# EAGLE board nrfctl (EAGLE 6.4)
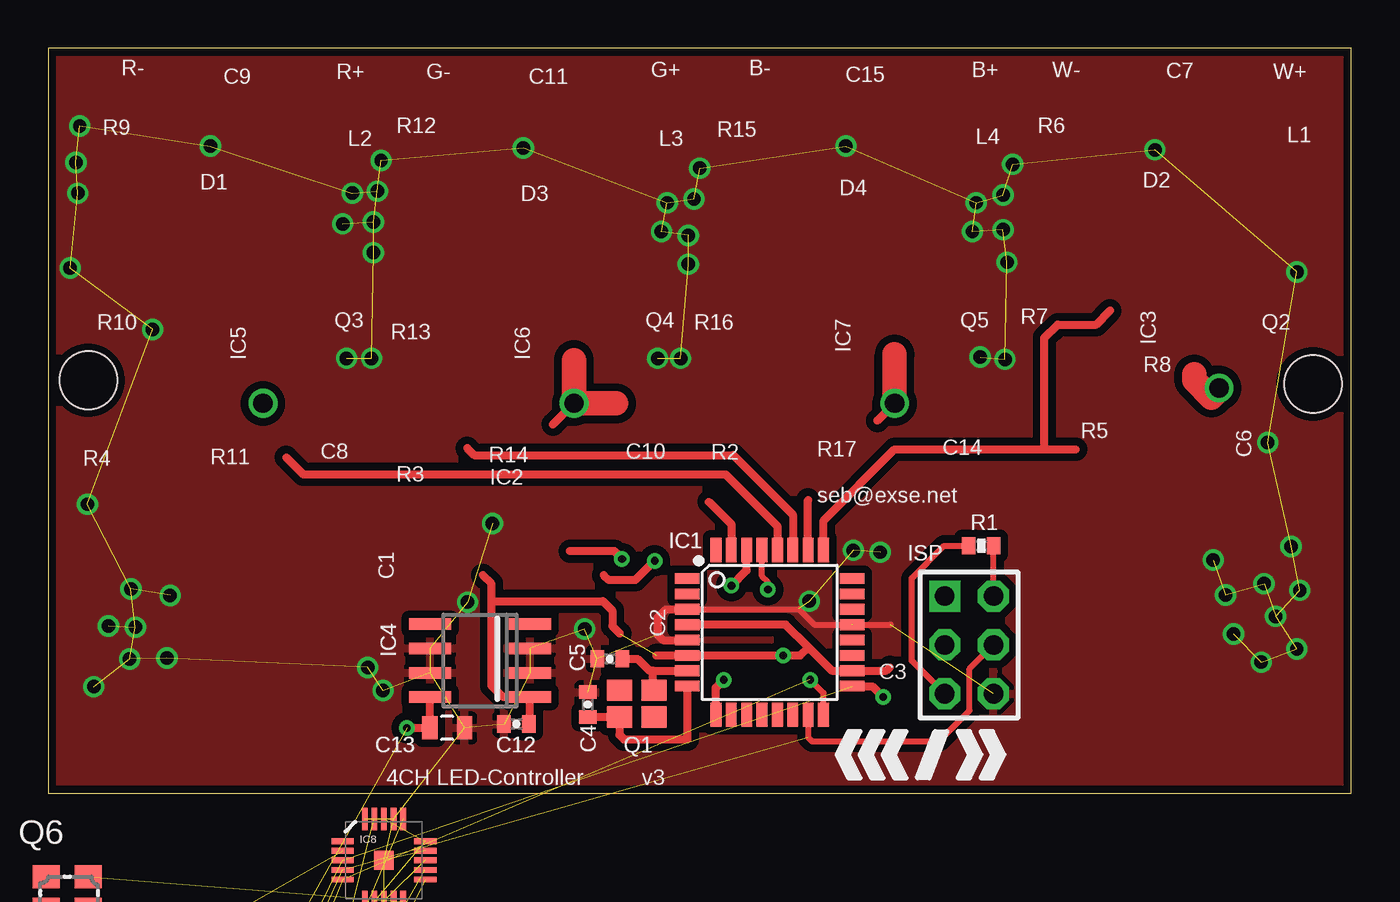
[diagram p0: board, top side]
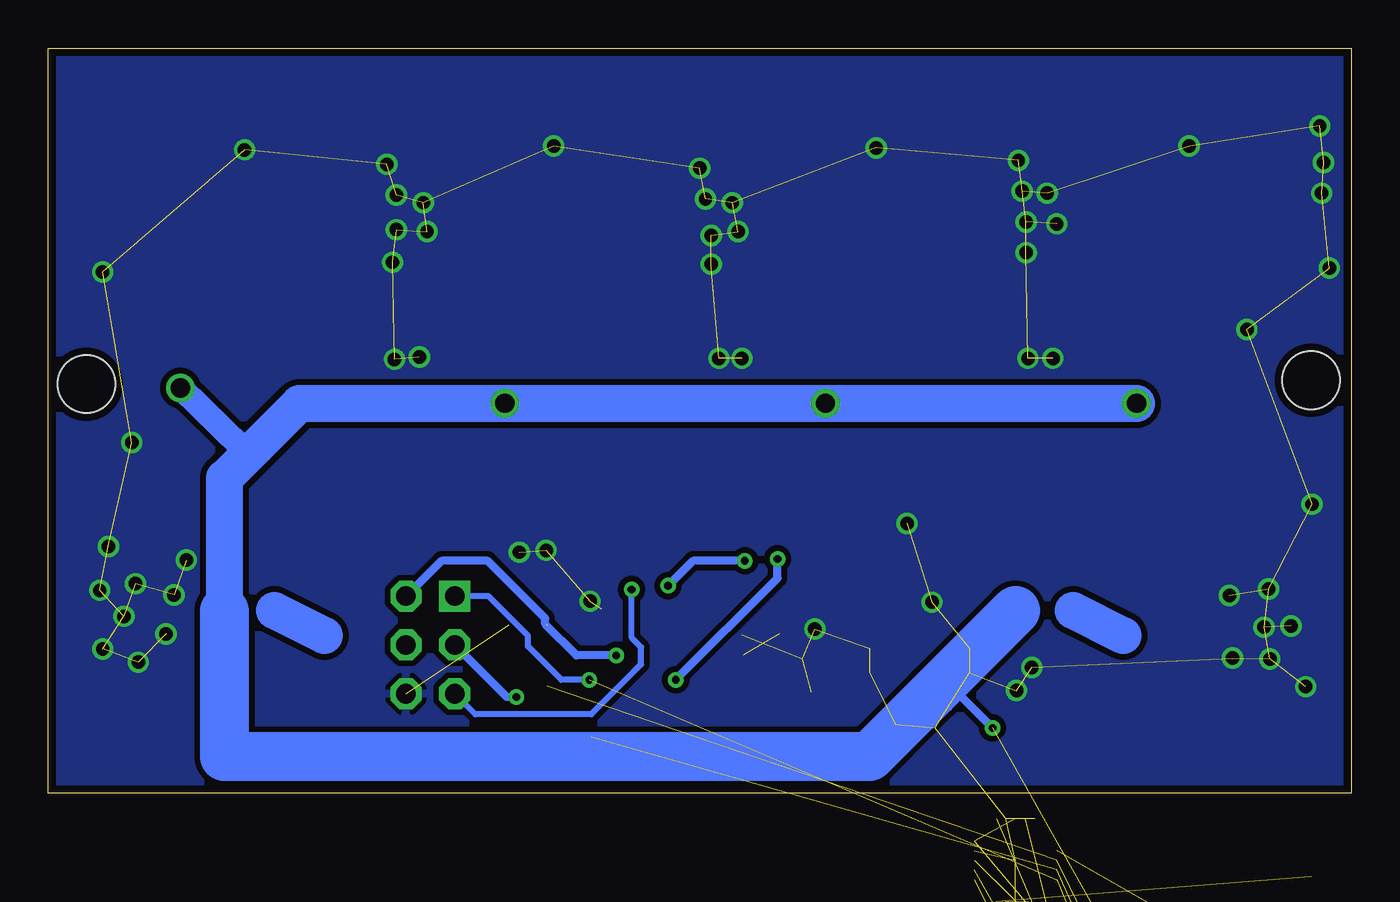
[diagram p1: board, bottom side, seen from below]

Size 67.9 x 38.8 mm. Coordinates in mm from the lower left corner, seen from the top.
Outline: 0,0 67.9,0 67.9,38.8 0,38.8 0,0
Copper layers (1*16): Top 0.035mm / dielectric 1.5mm / Bottom 0.035mm
Design rules "default *": minimum track width 0.2mm, minimum drill 0.5mm, track to track 0.2mm, track to pad 0.2mm, pad to pad 0.2mm, via to via 0.2mm, smd to smd 0mil, copper to edge 0.4mm, drill to drill 8mil, minimum pad ring 0.3mm, minimum via ring 8mil, stop-mask expansion 4mil, vias tented up to drill 40mil, thermal gap 10mil
Net classes: 2 GND/3V3: width 0.2 mm, drill 0.4 mm
Holes 3 mm at 2.1,21.5 65.9,21.3

## Footprints (pad centres in the part's own frame; a part is rotated, then mirrored left to right if it is on the bottom)
CHIPANTENNA = smd 4 x 1.8: 0 3.95,0 | smd 1 x 1.8: 1 -2.45,0
0402-CAP = smd 0.7 x 0.9: 1 -0.65,0; 2 0.65,0
0805 = smd 0.8 x 1.2: 1 -0.9,0; 2 0.9,0
C0402K = smd 0.925 x 0.74: 1 -0.6,0; 2 0.6,0
C0805K = smd 1.3 x 1.6: 1 -1,0; 2 1,0
R0805 = smd 1.3 x 1.5: 1 -0.95,0; 2 0.95,0
TQFP32-08 = smd 1.27 x 0.559: 1 -4.293,2.8; 2 -4.293,2; 3 -4.293,1.2; 4 -4.293,0.4; 5 -4.293,-0.4; 6 -4.293,-1.2; 7 -4.293,-2; 8 -4.293,-2.8; 17 4.293,-2.8; 18 4.293,-2; 19 4.293,-1.2; 20 4.293,-0.4; 21 4.293,0.4; 22 4.293,1.2; 23 4.293,2; 24 4.293,2.8 | smd 0.559 x 1.27: 9 -2.8,-4.293; 10 -2,-4.293; 11 -1.2,-4.293; 12 -0.4,-4.293; 13 0.4,-4.293; 14 1.2,-4.293; 15 2,-4.293; 16 2.8,-4.293; 25 2.8,4.293; 26 2,4.293; 27 1.2,4.293; 28 0.4,4.293; 29 -0.4,4.293; 30 -1.2,4.293; 31 -2,4.293; 32 -2.8,4.293
SO08 = smd 0.6 x 2.2: 1 -1.905,-2.6; 2 -0.635,-2.6; 3 0.635,-2.6; 4 1.905,-2.6; 5 1.905,2.6; 6 0.635,2.6; 7 -0.635,2.6; 8 -1.905,2.6
QFN20 = smd 1 x 1: 0 0,0 | smd 1.158 x 0.3: 1 -2.154,1; 2 -2.154,0.5; 3 -2.154,0; 4 -2.154,-0.5; 5 -2.154,-1; 11 2.154,-1; 12 2.154,-0.5; 13 2.154,0; 14 2.154,0.5; 15 2.154,1 | smd 0.3 x 1.158: 6 -1,-2.154; 7 -0.5,-2.154; 8 0,-2.154; 9 0.5,-2.154; 10 1,-2.154; 16 1,2.154; 17 0.5,2.154; 18 0,2.154; 19 -0.5,2.154; 20 -1,2.154
SOIC8 = smd 0.6 x 2.2: 1 -1.905,-2.6; 2 -0.635,-2.6; 3 0.635,-2.6; 4 1.905,-2.6; 5 1.905,2.6; 6 0.635,2.6; 7 -0.635,2.6; 8 -1.905,2.6
AVR-ISP-6 = drill 1.016 square: 1 -2.54,-1.27 | drill 1.016 octagon: 2 -2.54,1.27; 3 0,-1.27; 4 0,1.27; 5 2.54,-1.27; 6 2.54,1.27
R0402 = smd 0.7 x 0.9: 1 -0.65,0; 2 0.65,0
X22 = smd 1.3 x 1.1: 1 0.9,0.7; 2 -0.9,0.7; 3 -0.9,-0.7; 4 0.9,-0.7
CRYSTAL3.2X2.5 = smd 1.4 x 1.2: 1 -1.1,-0.85; 2 1.1,-0.85; 3 1.1,0.85; 4 -1.1,0.85
0402-RES = smd 0.7 x 0.9: 1 -0.65,0; 2 0.65,0
R0603 = smd 1 x 1.1: 1 -0.85,0; 2 0.85,0

## Placement (x,y rotation side)
ANT  CHIPANTENNA  [CHIPANTENNA]  11,-31.7 0 top  (outside the outline)
C4  22pF  [0402-CAP]  28.12,4.61 270 top
C5  22pF  [0402-CAP]  29.26,6.99 0 top
C12  100nF  [0402-CAP]  24.4,3.6 0 top
C13  1µF  [0805]  20.8,3.4 180 top
C16  100nF  [C0402K]  19.2,-17.6 0 top  (outside the outline)
C17  100nF  [C0402K]  -0.6,-22.6 0 top  (outside the outline)
C18  100nF  [C0402K]  5.2,-22.6 0 top  (outside the outline)
C19  1.5pF  [C0402K]  11,-22.6 0 top  (outside the outline)
C20  33nF  [C0402K]  11,-27.6 0 top  (outside the outline)
C21  22pF  [C0402K]  16,-27.6 0 top  (outside the outline)
C22  22pF  [C0402K]  20.9,-27.5 0 top  (outside the outline)
C23  1pF  [C0402K]  -0.6,-32.6 0 top  (outside the outline)
C24  2.2nF  [C0402K]  16.8,-22.6 0 top  (outside the outline)
C25  4.7pF  [C0402K]  -0.6,-27.6 0 top  (outside the outline)
C26  10uF  [C0805K]  6,-27.6 0 top  (outside the outline)
C27  100nF  [0402-CAP]  -10.5,-46.5 0 top  (outside the outline)
C28  1µF  [0805]  -10.7,-49.7 0 top  (outside the outline)
C29  1µF  [0805]  -13.8,-50.2 0 top  (outside the outline)
FERRITE  [R0805]  12.6,-13.4 0 top  (outside the outline)
IC1  MEGA48/88/168-AU  [TQFP32-08]  37.59,8.37 0 top
IC4  78L05SMD  [SO08]  22.5,6.9 90 top
IC8  NRF24L01SMD  [QFN20]  17.5,-3.5 0 top
IC9  LT1763CS8-3.3  [SOIC8]  -7.2,-41.8 0 top  (outside the outline)
ISP  AVR-ISP-6  [AVR-ISP-6]  47.98,7.72 270 top
L5  8.2nH  [R0402]  -0.6,-17.6 0 top  (outside the outline)
L6  3.9nH  [R0402]  6,-17.6 0 top  (outside the outline)
L7  2.7nH  [R0402]  12.6,-17.6 0 top  (outside the outline)
Q1  20MHz  [X22]  30.67,4.66 180 top
Q6  3.2X2.5CRYSTAL  [CRYSTAL3.2X2.5]  1,-5.2 0 top  (outside the outline)
R1  10K  [0402-RES]  48.61,12.88 0 top
R18  200  [0402-RES]  -1.1,-35.7 0 top  (outside the outline)
R19  200  [0402-RES]  -1.1,-39.4 0 top  (outside the outline)
R20  200  [0402-RES]  -1.1,-43.2 0 top  (outside the outline)
R22  R1002-1%63  [R0603]  -0.6,-12.6 0 top  (outside the outline)
R25  22k  [R0603]  4.4,-32.6 0 top  (outside the outline)

## Library data of the parts
ANT Q6 = badge
C4 C5 C12 C13 C27-C29 IC8 R1 R18-R20 = SparkFun
C16-C26 FERRITE L5-L7 R22 R25 = rcl
IC1 = avr-7
IC4 = linear
IC9 = linear-technology; MPN: LT1763CS8-3.3; OC_FARNELL: 1273617; OC_NEWARK: 57M6055
ISP = atmel
Q1 = seb

## Nets
!RE: IC1.9
!RST: IC1.29 ISP.5 R1.1
+3V3 [GND/3V3]: C27.2 C29.2 FERRITE.1 IC9.1 IC9.2
+3V3_RF: C16.1 C17.1 C18.1 C26.2 FERRITE.2 IC8.7 IC8.15 IC8.18 R22.2
+5V: C12.2 IC1.4 IC1.6 IC1.18 IC4.1 ISP.2 R1.2
+12V: C13.2 C28.2 IC4.8 IC9.5 IC9.8
CE: IC8.1
CSN: IC8.2 R22.1
GND: C4.1 C5.1 C12.1 C13.1 C16.2 C17.2 C18.2 C20.2 C21.2 C22.2 C23.2 C24.2 C25.2 C26.1 C28.1 C29.1 IC1.3 IC1.5 IC1.21 IC4.2 IC4.3 IC4.6 IC4.7 IC8.0 IC8.8 IC8.14 IC8.17 IC8.20 IC9.3 IC9.6 IC9.7 ISP.6 R25.1
IRQ: IC8.6
MISO: IC1.16 IC8.5 ISP.1 R20.1 R20.2
MOSI: IC1.15 IC8.4 ISP.4 R19.1 R19.2
N$29: C21.1 IC8.9 Q6.1
N$30: C22.1 IC8.10 Q6.3
N$31 [GND/3V3]: ANT.1 C19.1 C23.1
N$32: C27.1 IC9.4
N$70: C20.1 IC8.19
N$71: IC8.16 R25.2
N$73: C24.1 C25.1 IC8.11 L7.2
N$78: IC8.12 L5.2 L7.1
N$79: IC8.13 L5.1 L6.1
N$80: C19.2 L6.2
PB: IC1.26
PG: IC1.27
PR: IC1.28
PW: IC1.25
RXD: IC1.30
SCK: IC1.17 IC8.3 ISP.3 R18.1 R18.2
TXD: IC1.31
XTAL1: C5.2 IC1.7 Q1.3
XTAL2: C4.2 IC1.8 Q1.1

## Tracks (layer width: path | path; a pad name or v marks a point on that pad's centre or on a via)
!RE  (via drill 0.4)
  Top 0.406: 34.8,4 IC1.9 34.8,5.5 v35.2,5.9 | 27.19,12.6 29.5,12.6 v29.9,12.2
  Bottom 0.406: v29.9,12.2 29.9,11.2 v35.2,5.9
!RST  (via drill 0.4)
  Top 0.305: IC1.29 37.2,11.3 37.5,11 v37.5,10.6 | ISP.5 45,6.88 45,11.2 46.68,12.88 R1.1
  Bottom 0.305: v37.5,10.6 37.5,8.1 37,7.6 37,6.7 39.6,4.1 45.63,4.1 ISP.5
+3V3  (4 unrouted)
+3V3_RF  (8 unrouted)
+5V  (via drill 0.4)  (1 unrouted)
  Top 0.305: R1.2 49.25,12.87 ISP.2
  Top 0.406: 39.6,7.6 38.43,8.77 IC1.4 | 39.6,7.6 40.83,6.37 IC1.18 43.67,6.37 43.85,6.55 | 39.6,7.6 39.17,7.17 v38.3,7.17 IC1.6 31.69,7.17 | C12.2 25.1,3.55 IC4.1 23.7,5 23.1,5.6 23.1,10 | 23.1,10 23.1,10.9 22.64,11.36 | 23.1,10 28.9,10 29.4,9.5 29.4,8.7 29.79,8.31
  Bottom 0.406: v38.3,7.17 40.37,7.17 42,8.8 42,9.1 45,12.1 47.4,12.1 ISP.2
+12V  (via drill 0.4, 1)  (3 unrouted)
  Top 0.406: v44.1,20.3 43.2,19.4 | v27.4,20.3 26.3,19.2 | IC4.8 C13.2 v18.7,3.4
  Top 0.61: 59.7,21.8 59.7,21.6
  Top 1.27: 29.6,20.3 v27.4,20.3 27.4,22.55 | v44.1,20.3 44.1,22.85 | 59.7,21.8 59.7,21.5 60.6,20.6 61,21 v61,21.1
  Bottom 0.406: v18.7,3.4 20.55,5.25 21.75,5.25
  Bottom 1.27: v61,21.1 57.85,18.05 57.05,18.05
  Bottom 1.93: v11.2,20.3 v27.4,20.3 v44.1,20.3 54.8,20.3 57.05,18.05 58.7,16.4 58.7,9.49
  Bottom 2.54: 17.5,9.5 21.75,5.25 25.1,1.9 58.7,1.9 58.7,9.49
CSN  (1 unrouted)
GND  (via drill 0.7)  (91 unrouted)
  Top 0.305: 41.93,8.77 43.89,8.77 | IC1.21 39.93,8.77 39.1,9.6 39.07,9.57 IC1.3
  Top 0.406: IC1.5 32.03,7.97 31.75,8.25 31.75,9.14 32.19,9.57 IC1.3
  other vias: 57.66,33.5 4.55,8.64 39.66,10 65.2,10.56 63.2,6.82 63.54,18.26 49.85,22.59 48.56,22.71 3.15,8.7 2.38,5.54 60.7,12.14 6.36,10.3 65.05,7.51 4.25,6.99 4.32,10.63 63.95,9.21 6.19,7.03 61.75,8.29 63.35,10.91 61.34,10.32 32.95,22.64 31.75,22.64 15.55,22.64 16.85,22.64 16.95,28.14 16.95,29.74 17.15,31.34 17.35,32.94 1.15,27.34 1.55,31.24 1.45,32.84 1.65,34.74 49.95,27.64 49.75,29.34 49.75,31.14 50.25,32.74 33.35,27.54 33.35,29.04 33.65,30.94 33.95,32.54 15.35,29.64 15.85,31.24 31.95,29.24 32.25,30.74 48.15,29.24 48.35,30.74 64.75,12.84 65.05,27.14 16.65,6.54 17.45,5.34 23.15,14.04 43.35,12.54 21.85,9.94 41.95,12.64 27.95,8.54 41.56,33.7 24.76,33.6 8.46,33.7 5.45,24.14 2.05,15.04
  pour Bottom (isolate 0.305, rank 2): 0.04,38.78 0.1,0 67.89,0 67.88,38.78
  pour Top (isolate 0.406, rank 2): 0.01,38.75 0,0 67.82,0 67.88,38.78
MISO  (via drill 0.4)  (3 unrouted)
  Top 0.305: v39.7,5.9 40.4,5.21 IC1.16
  Bottom 0.305: v39.7,5.9 41.15,5.9 42.9,7.65 42.9,8.2 44.96,10.26 ISP.1
MOSI  (3 unrouted)
  Top 0.305: IC1.15 39.59,2.9 39.8,2.7 46.4,2.7 48,4.3 48,6.47 ISP.4
N$27
  Bottom 1.93: 11.9,8.2 14.5,9.5
N$28
  Bottom 1.93: 53.5,8.2 56.1,9.5
N$29  (2 unrouted)
N$30  (2 unrouted)
N$31  (2 unrouted)
N$32  (1 unrouted)
N$70  (1 unrouted)
N$71  (1 unrouted)
N$73  (3 unrouted)
N$78  (2 unrouted)
N$79  (2 unrouted)
N$80  (1 unrouted)
PB
  Top 0.406: IC1.26 39.59,15.27
PG
  Top 0.406: IC1.27 38.8,14.51 35.7,17.6 22.2,17.6 21.84,17.96
PR
  Top 0.406: IC1.28 37.99,13.9 35.3,16.6 13.3,16.6 12.41,17.49
PW
  Top 0.406: 51.9,17.9 44.1,17.9 40.4,14.2 IC1.25 | 51.9,17.9 53.54,17.9 | 55.33,25.12 54.6,24.4 52.6,24.4 51.9,23.7 51.9,17.9
RXD  (via drill 0.4)
  Top 0.406: v35.6,10.8 36.4,11.6 IC1.30 | 28.94,11.36 29.2,11.1 30.6,11.1 v31.6,12.1
  Bottom 0.406: v31.6,12.1 34.3,12.1 v35.6,10.8
SCK  (via drill 0.4)  (3 unrouted)
  Top 0.305: IC1.17
  Top 0.406: IC1.17 42.94,5.56 v43.5,5
  Bottom 0.406: v43.5,5 43.99,5 ISP.3
TXD
  Top 0.406: IC1.31 35.59,14.01 34.43,15.17
XTAL1
  Top 0.406: 31.5,6.37 31.33,6.37 30.71,6.99 C5.2 | 31.5,6.37 IC1.7 | Q1.3 31.5,5.23 31.5,6.37
XTAL2
  Top 0.406: Q1.1 29.84,3.69 | IC1.8 33.3,2.8 30,2.8 29.77,3.03 Q1.1 | Q1.1 C4.2

## Text on the board
tPlace: seb@exse.net | 4CH LED-Controller | v3
_tNames: R- | C9 | R+ | G- | C11 | G+ | B- | C15 | B+ | W- | C7 | W+ | L1 | R9 | L2 | R12 | L3 | R15 | L4 | R6 | D1 | D3 | D4 | D2 | IC7 | IC3 | R10 | IC5 | Q3 | R13 | IC6 | Q4 | R16 | Q5 | R7 | Q2 | R8 | R5 | R17 | C14 | R4 | R11 | C8 | R14 | C10 | R2 | C6 | R3 | IC2 | R1 | IC1 | ISP | C1 | C2 | IC4 | C3 | C5 | Q1 | C13 | C12 | C4
_tValues: SE14 | SE14 | SE14 | SE14 | SE14 | SE14 | SE14 | SE14 | 33µH / 1A | 33µH / 1A | 1µF | 33µH / 1A | 33µH / 1A | 1µF | 1µF | 1µF | MBRS140 | MBRS140 | MBRS140 | MBRS140 | 0R27 | 0R27 | 0R27 | 0R27 | LM3401 | LM3401 | 5.6k | LM3401 | MOSFET-PCHANNEL | LM3401 | MOSFET-PCHANNEL | 5.6k | MOSFET-PCHANNEL | 5.6k | MOSFET-PCHANNEL | 5.6k | 2.2µF / 50V | 47k | 47k | 47k | 47k | 2.2µF / 50V | 2.2µF / 50V | 2.2µF / 50V | RJ45-8L-B | 100K | 78L05SMD | MEGA48/88/168-AU | 1µF | RJ45-8L-B | 100nF